# EAGLE board bar (1) (EAGLE 5.10)
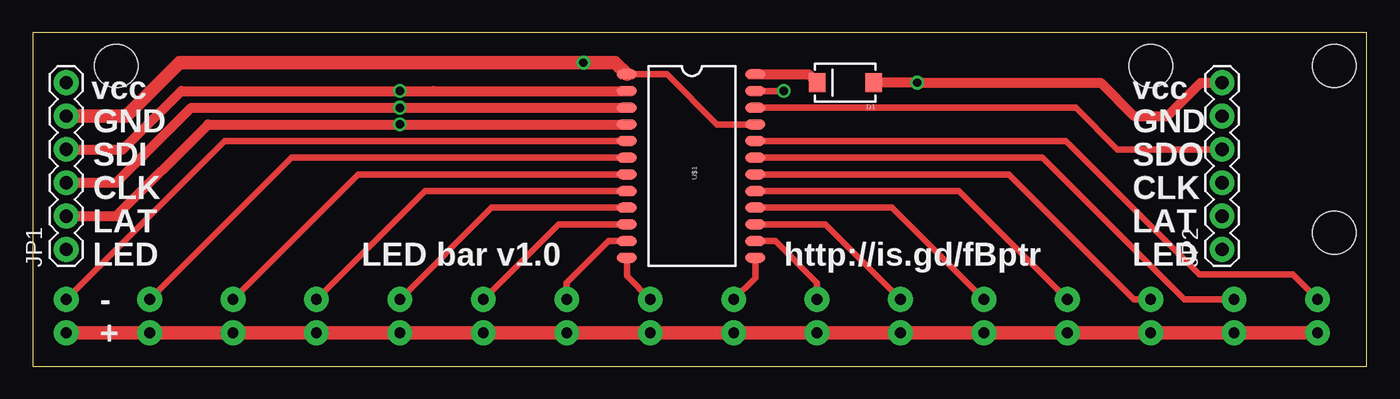
[diagram p0: board, top side]
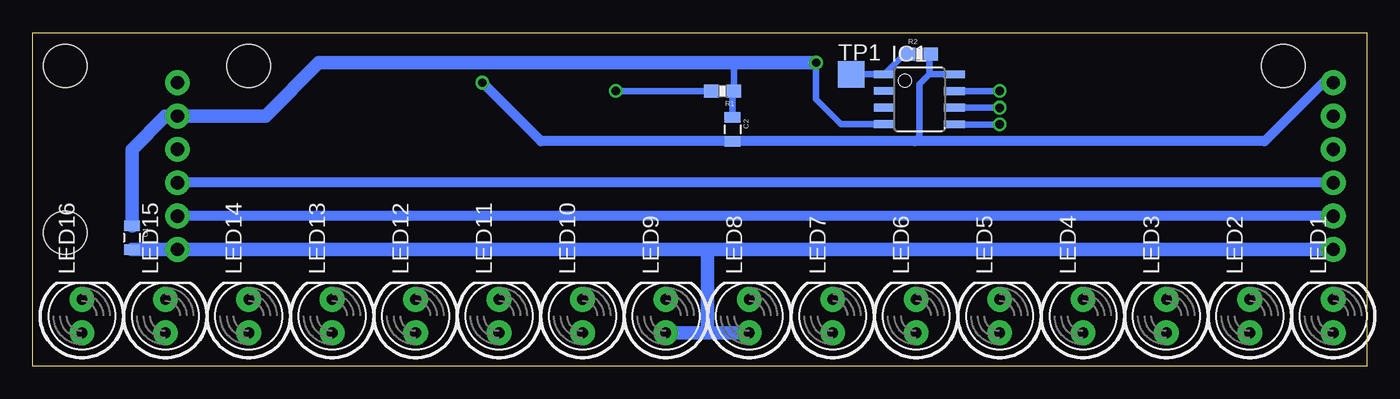
[diagram p1: board, bottom side, seen from below]

Size 101.52 x 25.39 mm. Coordinates in mm from the lower left corner, seen from the top.
Outline: 0,0 101.52,0 101.52,25.39 0,25.39 0,0
Copper layers (1*16): Top 0.035mm / dielectric 1.5mm / Bottom 0.035mm
Design rules "default": minimum track width 10mil, minimum drill 24mil, track to track 8mil, track to pad 8mil, pad to pad 8mil, via to via 8mil, smd to smd 8mil, copper to edge 40mil, drill to drill 8mil, minimum pad ring 10mil, minimum via ring 8mil, stop-mask expansion 4mil, vias tented up to drill 0mil, thermal gap 10mil

## Footprints (pad centres in the part's own frame; a part is rotated, then mirrored left to right if it is on the bottom)
0805 = smd 0.8 x 1.2: 1 -0.9,0; 2 0.9,0
SMA-DIODE = smd 1.27 x 1.47: A -2.15,0; C 2.15,0
8S1 = smd 0.6 x 1.6: 1 -1.905,-2.654; 2 -0.645,-2.654; 3 0.625,-2.654; 4 1.895,-2.654; 5 1.905,2.654; 6 0.635,2.654; 7 -0.635,2.654; 8 -1.905,2.654
1X06 = drill 1.016 pad 1.88 round: 1 0,0; 2 2.54,0; 3 5.08,0; 4 7.62,0; 5 10.16,0; 6 12.7,0
STAND-OFF = hole 3.302: 0,0
LED5MM = drill 0.813 pad 1.88 round: A -1.27,0; K 1.27,0
0603-RES = smd 1.1 x 1: 1 -0.85,0; 2 0.85,0
TP20SQ = smd 2 x 2: TP 0,0
SO-24W = smd 0.762 x 1.524: 1 -6.985,-4.953; 2 -5.715,-4.953; 3 -4.445,-4.953; 4 -3.175,-4.953; 5 -1.905,-4.953; 6 -0.635,-4.953; 7 0.635,-4.953; 8 1.905,-4.953; 9 3.175,-4.953; 10 4.445,-4.953; 11 5.715,-4.953; 12 6.985,-4.953; 13 6.985,4.826; 14 5.715,4.826; 15 4.445,4.826; 16 3.175,4.826; 17 1.905,4.826; 18 0.635,4.826; 19 -0.635,4.826; 20 -1.905,4.826; 21 -3.175,4.826; 22 -4.445,4.826; 23 -5.715,4.826; 24 -6.985,4.826

## Placement (x,y rotation side)
C1  10 uF  [0805]  93.98,9.78 270 bottom
C2  100 nf  [0805]  48.26,18.03 270 bottom
D1  [SMA-DIODE]  61.85,21.59 180 top
IC1  TINY13V-10SSU  [8S1]  34.04,20.32 270 bottom
JP1  [1X06]  2.54,8.89 90 top
JP2  [1X06]  90.53,8.89 90 top
JP3  STAND-OFF  [STAND-OFF]  99.06,22.86 0 top
JP4  STAND-OFF  [STAND-OFF]  6.35,22.86 0 top
JP5  STAND-OFF  [STAND-OFF]  99.06,10.16 0 top
JP6  STAND-OFF  [STAND-OFF]  85.09,22.86 0 top
LED1  [LED5MM]  2.54,3.81 90 bottom
LED2  [LED5MM]  8.89,3.81 90 bottom
LED3  [LED5MM]  15.24,3.81 90 bottom
LED4  [LED5MM]  21.59,3.81 90 bottom
LED5  [LED5MM]  27.94,3.81 90 bottom
LED6  [LED5MM]  34.29,3.81 90 bottom
LED7  [LED5MM]  40.64,3.81 90 bottom
LED8  [LED5MM]  46.99,3.81 90 bottom
LED9  [LED5MM]  53.34,3.81 90 bottom
LED10  [LED5MM]  59.69,3.81 90 bottom
LED11  [LED5MM]  66.04,3.81 90 bottom
LED12  [LED5MM]  72.39,3.81 90 bottom
LED13  [LED5MM]  78.74,3.81 90 bottom
LED14  [LED5MM]  85.09,3.81 90 bottom
LED15  [LED5MM]  91.44,3.81 90 bottom
LED16  [LED5MM]  97.79,3.81 90 bottom
R1  1k  [0603-RES]  49.02,20.95 180 bottom
R2  1k  [0603-RES]  34.04,23.75 0 bottom
TP1  TPTP20SQ  [TP20SQ]  39.24,22.23 0 bottom
U$1  STP16CP05SO-24  [SO-24W]  50.16,15.24 270 top

## Library data of the parts
C1 C2 D1 JP1-JP6 LED1-LED16 R1 R2 U$1 = SparkFun
IC1 = atmel
TP1 = testpad

## Nets
CLK: IC1.6 JP1.3 JP2.3 U$1.3
GND: C1.1 C2.1 IC1.4 JP1.5 JP2.5 R1.1 U$1.1 U$1.21
LE: IC1.5 JP1.2 JP2.2 U$1.4
N$1: D1.C U$1.24
N$3: IC1.1 R2.1 TP1.TP
N$5: LED1.K U$1.5
N$6: LED2.K U$1.6
N$7: LED3.K U$1.7
N$8: LED4.K U$1.8
N$9: LED5.K U$1.9
N$10: LED6.K U$1.10
N$11: LED7.K U$1.11
N$12: LED8.K U$1.12
N$13: LED9.K U$1.13
N$14: LED10.K U$1.14
N$15: LED11.K U$1.15
N$16: LED12.K U$1.16
N$17: LED13.K U$1.17
N$18: LED14.K U$1.18
N$19: LED15.K U$1.19
N$20: LED16.K U$1.20
REXT: R1.2 U$1.23
SDI: IC1.7 JP1.4 U$1.2
SDO: JP2.4 U$1.22
VCC: C2.2 D1.A IC1.8 JP1.6 JP2.6 R2.2
VLED: C1.2 JP1.1 JP2.1 LED1.A LED2.A LED3.A LED4.A LED5.A LED6.A LED7.A LED8.A LED9.A LED10.A LED11.A LED12.A LED13.A LED14.A LED15.A LED16.A

## Tracks (layer width: path | path; a pad name or v marks a point on that pad's centre or on a via)
CLK  (via drill 0.64)
  Top 0.762: U$1.3 v27.94,19.68 12.06,19.68 6.35,13.97 JP1.3
  Bottom 0.508: v27.94,19.68 IC1.6
  Bottom 0.762: JP1.3 JP2.3
GND  (via drill 0.64)
  Top 0.508: U$1.21 52.07,18.41 48.26,22.23 U$1.1
  Top 1.016: JP1.5 7.11,19.05 11.18,23.11 v41.91,23.11 44.32,23.11 U$1.1
  Bottom 0.508: R1.1 48.26,21.04 | C2.1 48.26,20.87 R1.1 | R1.1 48.17,23.03 48.26,23.11 | IC1.4 40.02,18.43 41.91,20.32 v41.91,23.11
  Bottom 1.016: v41.91,23.11 48.26,23.11 79.76,23.11 83.82,19.05 JP2.5 91.44,19.05 93.98,16.51 C1.1
LE  (via drill 0.64)
  Top 0.762: U$1.4 v27.94,18.41 13.34,18.41 6.35,11.43 JP1.2
  Bottom 0.508: v27.94,18.41 IC1.5
  Bottom 0.762: JP1.2 JP2.2
N$1
  Top 0.762: U$1.24 59.06,22.23 D1.C
N$3
  Bottom 0.508: R2.1 35.17,23.75 IC1.1 TP1.TP
N$5
  Top 0.508: U$1.5 14.61,17.14 LED1.K
N$6
  Top 0.508: U$1.6 19.68,15.88 LED2.K
N$7
  Top 0.508: U$1.7 24.77,14.61 LED3.K
N$8
  Top 0.508: U$1.8 29.84,13.34 LED4.K
N$9
  Top 0.508: U$1.9 34.92,12.06 LED5.K
N$10
  Top 0.508: U$1.10 40.01,10.79 LED6.K
N$11
  Top 0.508: U$1.11 43.81,9.53 40.64,6.35 LED7.K
N$12
  Top 0.508: U$1.12 45.21,6.86 LED8.K
N$13
  Top 0.508: U$1.13 54.99,6.73 LED9.K
N$14
  Top 0.508: U$1.14 56.52,9.53 59.69,6.35 LED10.K
N$15
  Top 0.508: U$1.15 60.33,10.79 LED11.K
N$16
  Top 0.508: U$1.16 65.41,12.06 LED12.K
N$17
  Top 0.508: U$1.17 70.48,13.34 LED13.K
N$18
  Top 0.508: U$1.18 74.3,14.61 83.82,5.08 LED14.K
N$19
  Top 0.508: U$1.19 76.83,15.88 87.63,5.08 LED15.K
N$20
  Top 0.508: U$1.20 78.61,17.14 88.77,6.99 95.89,6.99 LED16.K
REXT  (via drill 0.64)
  Top 0.508: v57.15,20.95 U$1.23
  Bottom 0.508: R1.2 v57.15,20.95
SDI  (via drill 0.64)
  Top 0.762: U$1.2 30.48,20.95 v27.94,20.95 11.3,20.95 6.86,16.51 JP1.4
  Bottom 0.508: v27.94,20.95 IC1.7
SDO
  Top 0.508: U$1.22 79.38,19.68 82.55,16.51 JP2.4
VCC  (via drill 0.64)
  Top 0.762: D1.A v67.31,21.59 81.28,21.59 83.82,19.05 86.36,19.05 88.9,21.59 JP2.6
  Bottom 0.508: 32.91,23.75 R2.2 33.27,23.66 33.27,22.23 | 33.27,22.23 34.04,21.46 34.04,17.52 34.42,17.13 | 33.27,22.23 IC1.8
  Bottom 0.762: v67.31,21.59 62.85,17.13 C2.2 34.42,17.13 7.76,17.13 3.3,21.59 JP1.6
VLED
  Top 1.016: LED1.A LED2.A LED3.A LED4.A LED5.A LED6.A LED7.A LED8.A LED9.A LED10.A LED11.A LED12.A LED13.A LED14.A LED15.A LED16.A
  Bottom 1.016: LED8.A 50.16,2.54 | 50.16,2.54 LED9.A | 50.16,2.54 50.16,8.89 | 50.16,8.89 JP1.1 | 50.16,8.89 JP2.1 93.97,8.89 C1.2

## Text on the board
tPlace: vcc | vcc | GND | GND | SDI | SDO | CLK | CLK | LAT | LAT | LED | LED bar v1.0 | http://is.gd/fBptr | LED | - | +